# Altium PCB PCB3.PcbDoc (part 2 of 2)
Units mil, origin at the board's own origin, x right, y up, seen from the top; angles counter-clockwise.
Board outline 2200 x 2730 mil, 2 copper layers (Top Layer, Bottom Layer); 68 components, 62 nets, 257 pads, 89 vias.
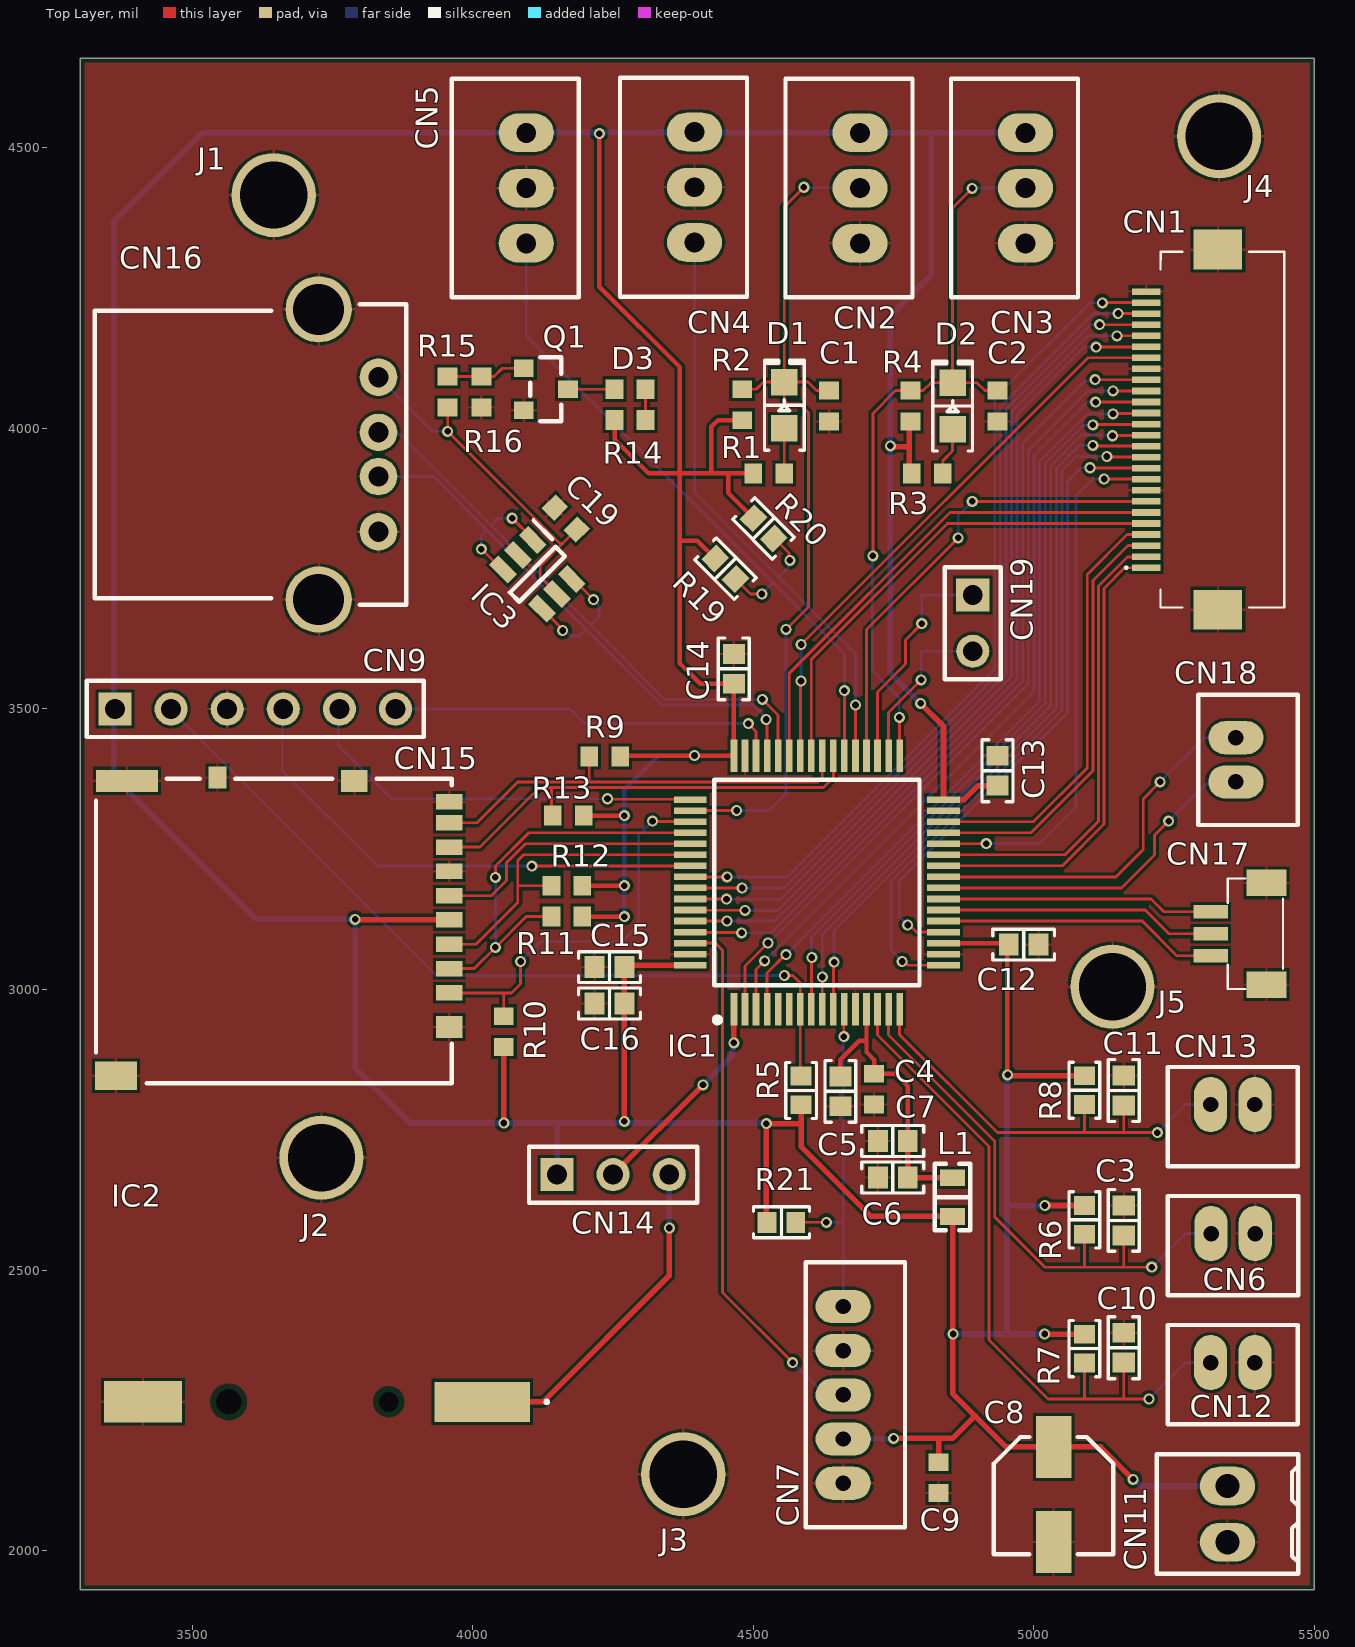
[diagram p0: Top Layer view]

## Via types
v1: diameter 19.68, hole 11.81, Top Layer to Bottom Layer, 89 vias

## Nets (pads, with @x,y where several pads share a name; then routed paths per layer and width w, separated by ;. In a path a pad name is that pad's centre, name@x,y a point inside that pad or via, vN(x,y) a via of type N, cw(c..) or ccw(c..) an arc to the next point about the centre after c; other vN are vias at no path point) (continued)
X_STOP: C2.1 CN3.2 D2.2 IC1.33 R4.2 | length 1337.3
  Top Layer w5: v1(4713,3773) 4713,4027 4753.56,4067.56 R4.2 4802.56,4067.56 4816.34,4081.34 D2.2 ; v1(4760,3485) 4760.3,3484.7 4760.3,3417.11 IC1.33 ; v1(4889.78,4427.88) 4855,4393.1 D2.2 ; C2.1 4912.44,4067.56 4898.66,4081.34 D2.2
  Bottom Layer w5: v1(4713,3773) 4712,3772 4712,3568 4760,3520 v1(4760,3485) ; v1(4889.78,4427.88) 4890.33,4428.43 CN3.2
Y_STOP: C1.1 CN2.2 D1.2 IC1.50 R2.2 | length 1592.8
  Top Layer w5: IC1.50 4387.12,3318.93 4469.93,3318.93 v1(4470,3319) ; R2.2 4505,4070 4517.68,4082.68 D1.2 ; v1(4558,3642) 4598,3682 4598,4028 4582,4044 4561,4044 4555,4050 D1.2 ; v1(4590,4430) 4555,4395 D1.2 ; C1.1 4612.44,4067.56 4597.32,4082.68 D1.2
  Bottom Layer w5: v1(4470,3319) 4528,3319 4558,3349 v1(4558,3642) ; v1(4590,4430) 4590.79,4429.21 4689.21,4429.21 CN2.2
Z-: CN7.5 IC1.11 R21.1 | length 615.3
  Top Layer w5: R21.1 v1(4630,2585) ; v1(4661.08,2916.08) 4661.08,2963.92 IC1.11
  Bottom Layer w5: v1(4630,2585) 4660,2585 ; CN7.5 4660,2585 ; v1(4661.08,2916.08) 4660,2915 4660,2585
pads on no net: IC1.5 IC1.6 IC2.MH1 IC2.MH2

## Polygon pours and split planes (outlines as drawn)
GND on Top Layer "GND_L01_P000" (solid, pour order 0): 3300,4660 5500,4660 5500,1930 3300,1930
GND on Bottom Layer "GND_L02_P001" (solid, pour order 1): 3300,4660 5500,4660 5500,1930 3300,1930

## Silkscreen, mask and mechanical layers (free items; w line width, h text height)
Bottom Overlay:
  text "Łukasz Weber 2023" at 4348,1954 h60
Mechanical 1:
  lines w1: 3300,1930 3300,4120 3300,4660 5370,4660 5500,4660 5500,1960 5500,1930 3300,1930